# Altium PCB power1.PCBDOC
Units mil, origin at the board's own origin, x right, y up, seen from the top; angles counter-clockwise.
Board outline 6000 x 4000 mil, 2 copper layers (Top Layer, Bottom Layer); 46 components, 17 nets, 112 pads, 0 vias.
Unrouted connection lines stored in the file: 2.
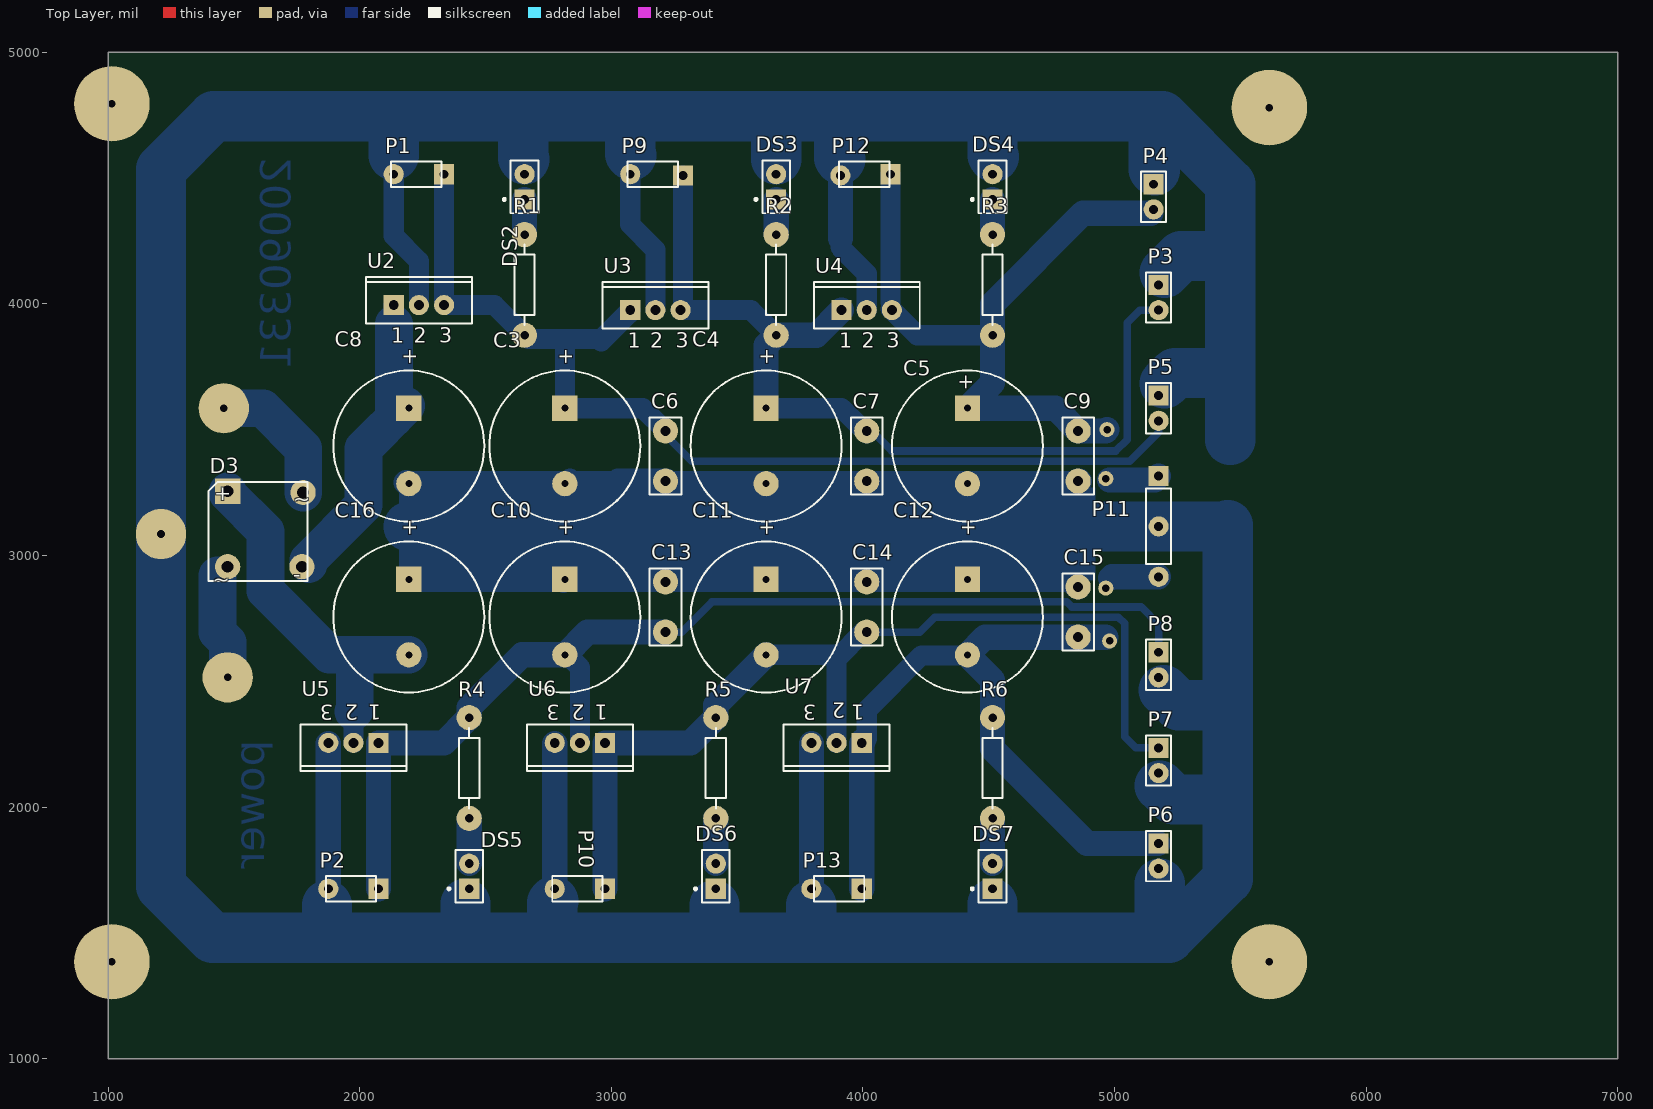
[diagram p0: Top Layer view]
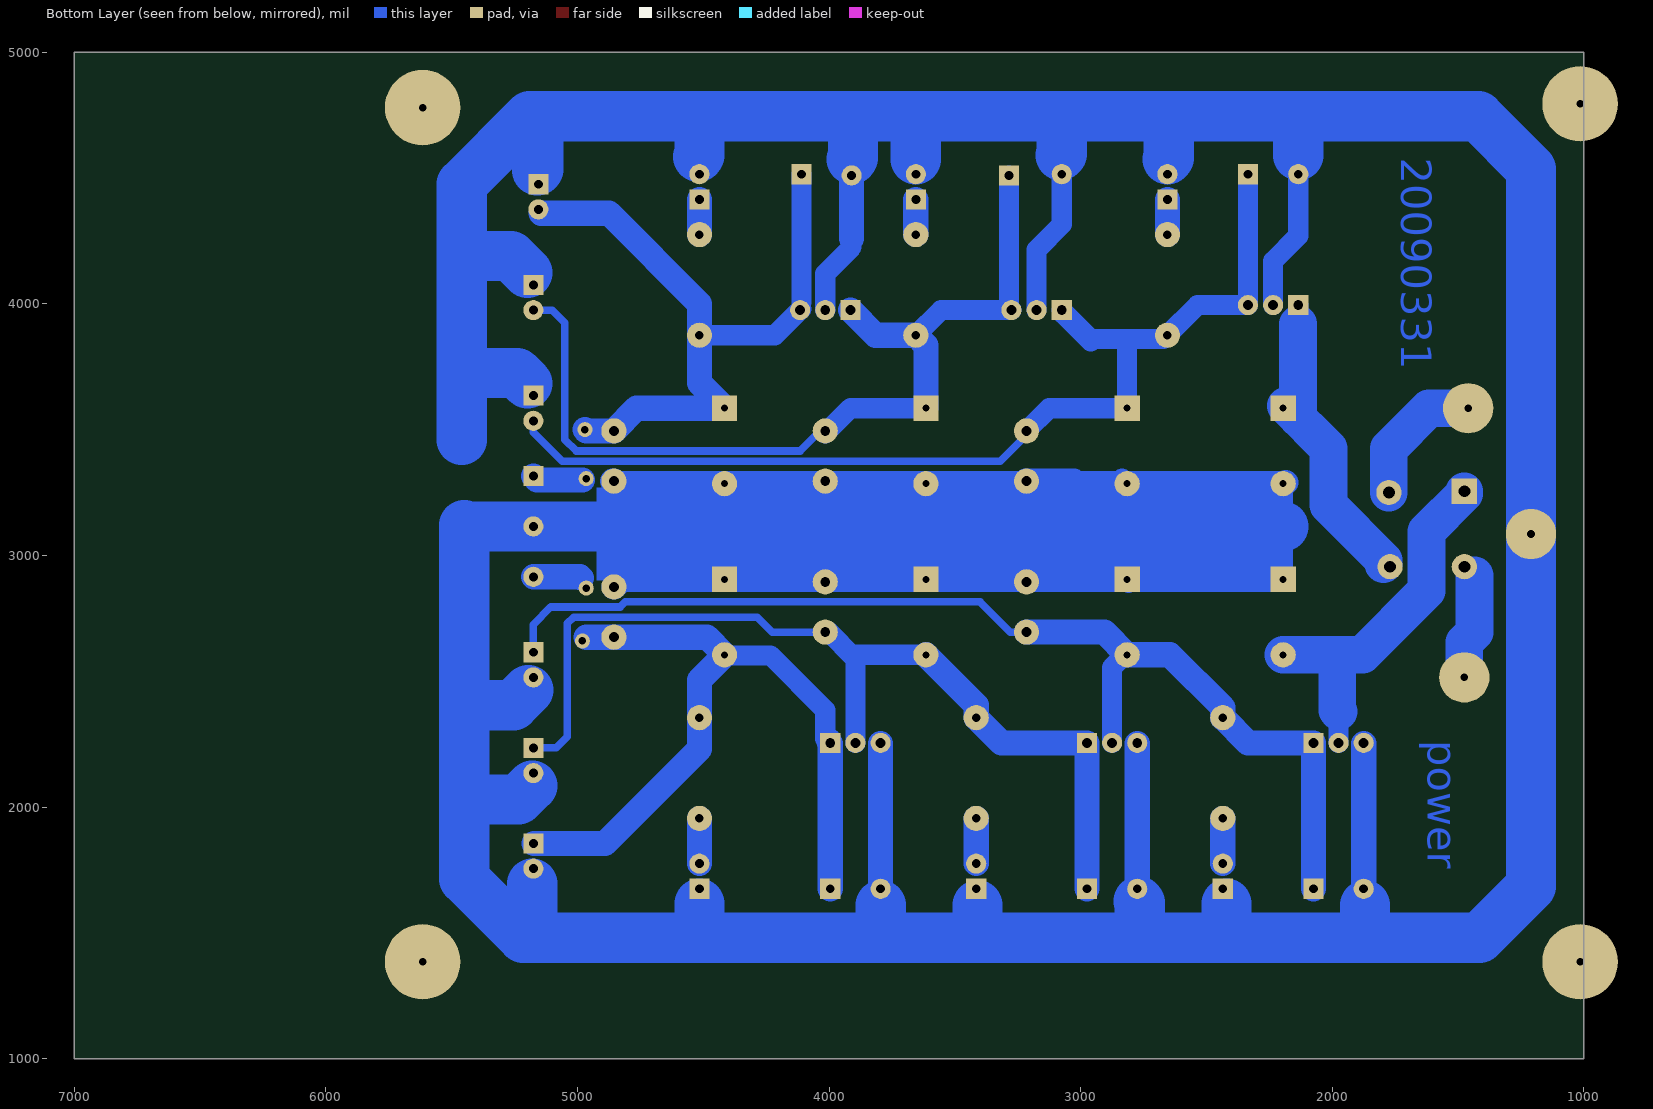
[diagram p1: Bottom Layer view, seen from below]

## Layer stack, top to bottom
Top Layer: signal copper 1.4
Dielectric: dielectric 12.6, FR-4, Dk 4.8
Bottom Layer: signal copper 1.4

## Board outline
1000,1000 7000,1000 7000,5000 1000,5000

## Design rules (kind name [scope] priority, off if disabled: settings)
Clearance [All] p1: gap=10
ComponentClearance [All] p1: gap=10 collisioncheckmode=3 verticalgap=10
PolygonConnect [All] p1: connectstyle=Relief reliefconductorwidth=10 reliefentries=4 polygonreliefangle="90 Angle"
RoutingVias [All] p1: holewidth=28 width=50 viastyle="Through Hole" minholewidth=28 minwidth=50 maxholewidth=28 maxwidth=50
SolderMaskExpansion [All] p1: expansion=4
TestPointUsage [All] p1: valid=0 allowmultiple=FALSE
Testpoint [All] p1: side=15 testpointundercomponent=TRUE minsize=40 maxsize=100 preferedsize=60 minholesize=0 maxholesize=40 preferedholesize=32 testpointgrid=1 style=1023 order=0-112345678
Width [All] p1: maxlimit=200 minlimit=10 preferedwidth=80 bottomlayer_prefwidth=200 minimp=50.000000 maximp=50.000000 favimp=50.000000
17 further rules are at their usual default settings.

## Components (designator, comment, footprint, x,y, rotation, side; value= is the part's Value field where it differs from the comment)
C3 "Cap Pol1" RB7.6-15 2815,3435 r90 top
C4 "Cap Pol1" RB7.6-15 3615,3435 r90 top
C5 "Cap Pol1" RB7.6-15 4415,3435 r90 top
C6 "Cap" CAPR5.08-7.8x3.2 3215,3395 r90 top
C7 "Cap" CAPR5.08-7.8x3.2 4015,3395 r90 top
C8 "Cap Pol1" RB7.6-15 2195,3435 r90 top
C9 "Cap" CAPR5.08-7.8x3.2 4855,3395 r90 top
C10 "Cap Pol1" RB7.6-15 2815,2755 r90 top
C11 "Cap Pol1" RB7.6-15 3615,2755 r90 top
C12 "Cap Pol1" RB7.6-15 4415,2755 r90 top
C13 "Cap" CAPR5.08-7.8x3.2 3215,2795 r270 top
C14 "Cap" CAPR5.08-7.8x3.2 4015,2795 r270 top
C15 "Cap" CAPR5.08-7.8x3.2 4855,2775 r270 top
C16 "Cap Pol1" RB7.6-15 2195,2755 r90 top
D3 "Bridge1" E-BIP-P4/D10 1595,3095 r0 top
DS2 "LED0" PIN2 2655,4415 r90 top
DS3 "LED0" PIN2 3655,4415 r90 top
DS4 "LED0" PIN2 4515,4415 r90 top
DS5 "LED0" PIN2 2435,1675 r90 top
DS6 "LED0" PIN2 3415,1675 r90 top
DS7 "LED0" PIN2 4515,1675 r90 top
P1 "Header 2" HDR1X2#1 2275,4515 r180 top
P2 "Header 2" HDR1X2#1 2015,1675 r180 top
P3 "Header 2" HDR1X2#2 5175,4075 r270 top
P4 "Header 2" HDR1X2#2 5155,4475 r270 top
P5 "Header 2" HDR1X2#2 5175,3635 r270 top
P6 "Header 2" HDR1X2#2 5175,1855 r270 top
P7 "Header 2" HDR1X2#2 5175,2235 r270 top
P8 "Header 2" HDR1X2#2 5175,2615 r270 top
P9 "Header 2" HDR1X2#3 3215,4515 r180 top
P10 "Header 2" HDR1X2#1 2915,1675 r180 top
P11 "Header 3" HDR1X3 5175,3215 r270 top
P12 "Header 2" HDR1X2#4 4055,4515 r180 top
P13 "Header 2" HDR1X2#5 3955,1675 r180 top
R1 "10K" AXIAL-0.4 2655,4075 r270 top
R2 "5K" AXIAL-0.4 3655,4075 r270 top
R3 "1K" AXIAL-0.4 4515,4075 r270 top
R4 "10K" AXIAL-0.4 2435,2155 r90 top
R5 "5K" AXIAL-0.4 3415,2155 r90 top
R6 "1K" AXIAL-0.4 4515,2155 r90 top
U2 "LM78L15ACZ" T03B 2235,3995 r0 top
U3 "LM78L12ACH" T03B 3175,3975 r0 top
U4 "LM78L05ACZ" T03B 4015,3975 r0 top
U5 "LM79L15ACZ" T03B 1975,2255 r180 top
U6 "LM79L12ACZ" T03B 2875,2255 r180 top
U7 "LM79L05ACZ" T03B 3895,2255 r180 top

## Footprints (in the part's own frame and the unit in brackets; to place one, negate y for a bottom-side part, rotate by r counter-clockwise, add the part's x,y. Pads: shape width x height; smd on the part's side, far side on the other; paste and mask are expansions set on the pad)
AXIAL-0.4 [mm] "Resistor; 2 Leads"
  round 2.541 hole 0.85: 1(-5.08,0) 2(5.08,0)
  silkscreen extent -4.06,-1.02 4.06,1.02
CAPR5.08-7.8x3.2 [mm] "Capacitor, Ceramic, Thru-Hole, Dipped Radial; Body 7.8 x 3.2 mm (WxT) Pin Spacing 5.08 mm (typ)"
  round 2.541 hole 1: 1(-2.54,0) 2(2.54,0)
  silkscreen extent -3.9,-1.6 3.9,1.6
E-BIP-P4/D10 [mil] "Bridge Rectifier; 4 Terminals; Body 9.4 x 9.4 mm (typ); Pitch 5.08 mm"
  rect 100.06x100.06 hole 47.24: 1(-120,160)
  round 100.06 hole 47.24: 2(-120,-140) 3(175,-140) 4(180,155)
  silkscreen extent -197,-197 197,197
HDR1X2#1 [mil] "Connector; Header; 2 Position"
  rect 80.06x80.06 hole 35.43: 1(-60,0)
  round 80.06 hole 35.43: 2(140,0)
  silkscreen extent -50,-50 150,50
HDR1X2#2 [mil] "Connector; Header; 2 Position"
  rect 80.06x80.06 hole 35.43: 1(0,0)
  round 80.06 hole 35.43: 2(100,0)
  silkscreen extent -50,-50 150,50
HDR1X2#3 [mil] "Connector; Header; 2 Position"
  rect 80.06x80.06 hole 35.43: 1(-70,5)
  round 80.06 hole 35.43: 2(140,0)
  silkscreen extent -50,-50 150,50
HDR1X2#4 [mil] "Connector; Header; 2 Position"
  rect 80.06x80.06 hole 35.43: 1(-55,0)
  round 80.06 hole 35.43: 2(145,5)
  silkscreen extent -50,-50 150,50
HDR1X2#5 [mil] "Connector; Header; 2 Position"
  rect 80.06x80.06 hole 35.43: 1(-40,0)
  round 80.06 hole 35.43: 2(160,0)
  silkscreen extent -50,-50 150,50
HDR1X3 [mm] "Connector; Header; 3 Position"
  rect 2.033x2.033 hole 0.9: 1(-2.54,0)
  round 2.033 hole 0.9: 2(2.54,0) 3(7.62,0)
  silkscreen extent -1.27,-1.27 6.35,1.27
PIN2 [mm] "Photosensitive Diode; 2 Leads"
  rect 2.033x2.033 hole 0.9: 1(0,0)
  round 2.033 hole 0.9: 2(2.54,0)
  silkscreen extent -1.4,-1.4 3.94,2.17
RB7.6-15 [mm] "Polarized Capacitor (Radial); 2 Leads"
  rect 2.541x2.541 hole 0.7: 1(3.81,0)
  round 2.541 hole 0.7: 2(-3.81,0)
  silkscreen extent -7.62,-7.62 7.62,7.62
T03B [mm] "TO, Thru-Hole, Vertical, Heatsink Mounted; 3 In-Line Leads; Pitch 2.54 mm"
  rect 2.033x2.033 hole 1: 1(-2.54,0)
  round 2.033 hole 1: 2(0,0) 3(2.54,0)
  silkscreen extent -5.35,-1.85 5.35,2.85

## Part data
C3 C4 C5 C8 C10 C11 C12 C16: "Polarized Capacitor (Radial)"
C6 C7 C9 C13 C14 C15: "Capacitor"
D3: "Full Wave Diode Bridge"
DS2 DS3 DS4 DS5 DS6 DS7: "Typical INFRARED GaAs LED"
P1 P2 P3 P4 P5 P6 P7 P8 P9 P10 P12 P13: "Header, 2-Pin"
P11: "Header, 3-Pin"
R1 R2 R3 R4 R5 R6: library part Res2, "Resistor"
U2 U3 U4: "3-Terminal Positive Regulator"
U5 U6 U7: "3-Terminal Negative Regulator"

## Free pads (board coordinates)
  round 60 hole 30: 0(4965,3305) 1(4965,2870) 2(4970,3500) 3(4980,2660)
  round 200 hole 30: 4(1460,3585) 5(1210,3085) 6(1475,2515)
  round 300 hole 30: 7(1015,1385) 7(1015,4795) 7(5615,1385) 7(5615,4780)

## Nets (pads, with @x,y where several pads share a name; then routed paths per layer and width w, separated by ;. In a path a pad name is that pad's centre, name@x,y a point inside that pad or via, vN(x,y) a via of type N, cw(c..) or ccw(c..) an arc to the next point about the centre after c; other vN are vias at no path point)
+5V: C5.1 C9.2 P4.2 P11.1 P12.1 pad.0 pad.2 R3.2 U4.3 | length 2988.3
  Bottom Layer w80: U4.3@4110,3980 4215,3875 R3.2 ; U4.3@4110,4006.31 P12.1
  Bottom Layer w100: pad.2 4965,3495 C9.2 4765,3585 C5.1 4515,3685 4515,4000 4875,4360 P4.2@5145,4360 ; pad.0@4980,3300 5160,3300 P11.1
+12V: C4.1 C7.2 P3.2 P9.1 R2.2 U3.3 U4.1 | length 3717.4
  Bottom Layer w30: C7.2 4035,3495 4115,3415 5005,3415 5050.51,3460.51 5050.51,3925.51 5100,3975 P3.2
  Bottom Layer w80: P9.1 3285,3985 U3.3 3555,3975 R2.2 ; C4.1 3915,3585 4015,3485 C7.2
  Bottom Layer w100: C4.1 3615,3835 R2.2 3815,3875 U4.1
+15V: C3.1 C6.2 P1.1 P5.2 R1.2 U2.3 U3.1 | length 4342.5
  Bottom Layer w30: C6.2 3215,3480 3320,3375 5060,3375 5175,3490 P5.2
  Bottom Layer w80: P1.1 U2.3 2535,3995 R1.2 2670,3860 2960,3860 U3.1 ; 2815,3860 C3.1 3125,3585 C6.2 ; 2960,3850 U3.1@3070,3960
-5V: C12.2 C15.2 P6.1 P11.3 P13.1 pad.1 pad.3 R6.2 U7.1 | length 3318.2
  Bottom Layer w80: U7.1@3995,2215 U7.1 ; U7.1@4000,2250 U7.1@4005,2250 ; U7.1@4015,2270 4015,2385 4232.7,2602.7 C12.2@4412.7,2602.7 ; C12.2 4470,2550
  Bottom Layer w100: P13.1 3995,2252.65 4000,2257.65 U7.1@4000,2265 ; pad.3@4965,2675 4485,2675 C12.2 4515,2505 4515,2230 4890,1855 P6.1@5172.65,1855 ; 4985,2910 4990,2915 P11.3
-12V: C11.2 C14.2 P7.1 P10.1 R5.2 U6.1 U7.2 | length 3917
  Bottom Layer w30: C14.2 4225,2695 4285,2755 5015,2755 5040,2730 5040,2280 5085,2235 P7.1
  Bottom Layer w80: 3575,2555 C11.2@3625,2605 ; C11.2 3910,2605 ; U7.2 3895,2590 4005,2700 C14.2@4010,2700
  Bottom Layer w100: P10.1 U6.1@2975,2252.65 ; U6.1 3315,2255 R5.2 3415,2405 C11.2
-15V: C10.2 C13.2 P2.1 P8.1 R4.2 U5.1 U6.2 | length 4458.1
  Bottom Layer w30: C13.2 3280,2695 3400,2815 4809.95,2815 4829.95,2795 5105,2795 5175,2725 P8.1
  Bottom Layer w80: C10.2@2820,2610 2875,2555 U6.2
  Bottom Layer w100: P2.1 U5.1@2075,2252.65 ; U5.1 2335,2255 R4.2 2435,2395 2645,2605 C10.2 2905,2695 C13.2
GND: C3.2 C4.2 C5.2 C6.1 C7.1 C8.2 C9.1 C10.1 C11.1 C12.1 C13.1 C14.1 C15.1 C16.1 DS2.2 DS3.2 DS4.2 DS5.1 DS6.1 DS7.1 P1.2 P2.2 P3.1 P4.1 P5.1 P6.2 P7.2 P8.2 P9.2 P10.2 P11.2 P12.2 P13.2 pad.5 U2.2 U3.2 U4.2 U5.3 U6.3 U7.3 | length 31922.6
  Bottom Layer w80: U5.3 U5.3@1875,2257.35 ; P1.2 2135,4270 2235,4170 U2.2 ; C3.2@2805,3295 C3.2 ; C10.1@2810,2890 C10.1@2815,2895 ; C10.1@2830,2895 C13.1 C13.1@3220,2890 ; C3.2@2835,3305 C3.2@2845,3295 ; 3025,3305 C6.1@3220,3305 ; P9.2 3075,4315 3175,4215 U3.2 ; C13.1@3225,2900 3610,2900 C11.1 C14.1@4010,2905 ; P12.2 3910,4225 4015,4120 U4.2 ; C14.1@4000,2900 4415,2900 4420,2895 4025,2895 C14.1@4025,2890
  Bottom Layer w100: P2.2 U5.3@1875,2252.65 ; C8.2@2185,3290 2190,3285 4850,3285 4860,3295 C9.1 C9.1@4845,3285 ; C16.1 C15.1@4825,2905 ; P10.2 U6.3@2775,2252.65 ; 3795,1480 3795,1515 ; 3795,1610 U7.3@3795,2252.65 ; 3910,4260 P12.2 ; C12.1 C15.1@4825,2905 ; C15.1 C15.1@4825,2905
  Bottom Layer w200: 1870,1490 1870,1610 ; 2135,4590 2135,4710 ; 2195,3115 5425,3115 5440,3100 ; 2420,1520 2420,1615.73 ; 2650,4710 2650,4580 2655,4575 ; 2765,1495 2765,1620 2770,1625 ; 3075,4720 3075,4595 3080,4590 ; 3410,1515 3410,1610 ; 3655,4575 3655,4720 ; 3795,1515 3795,1610 ; 3905,4720 3905,4580 3910,4575 ; 4515,1530 4515,1615.03 ; 4515,4725 4515,4590 4520,4585 ; 5155,4695 5155,4535 5160,4530 ; 5180,1525 5180,1695 ; 5180.03,2084.97 5235,2030 5415,2030 ; 5195.03,2464.97 5255,2405 5390,2405 ; 5198.22,3683.22 5240,3725 5415,3725 ; 5198.22,4123.22 5265,4190 5385,4190 ; 5450,3120 5450,1715 5215,1480 1415,1480 1210,1685 1210,4535 1420,4745 5190,4745 5460,4475 5460,3460
NetC8_1: C8.1 D3.3 U2.1 | length 1319.5
  Bottom Layer w80: D3.3 1785,2955 D3.3@1795.97,2965.97 ; 2135,3615 C8.1@2170,3580 ; 2135,3919.59 U2.1
  Bottom Layer w150: D3.3@1795.97,2965.97 1795.97,2980.97 2015,3200 2015,3425 C8.1@2185,3595 ; 2135,3919.59 2136.18,3918.41 2136.18,3546.18
NetC16_2: C16.2 D3.1 U5.2 | length 1583.8
  Bottom Layer w80: U5.2 1975,2380 ; 1975,2535 2045,2605
  Bottom Layer w150: D3.1 1475,3245 1625,3095 1625,2860 1880,2605 C16.2 ; 1975,2380 1980,2385 1980,2605
NetD3_2: D3.2 pad.6 | length 421.6
  Bottom Layer w150: 1435,2920 1435,2695 1475,2655 pad.6
NetD3_4: D3.4 pad.4 | length 556.3
  Bottom Layer w150: pad.4 1615,3585 1775,3425 D3.4
NetDS2_1: DS2.1 R1.1 | length 140
  Bottom Layer w100: R1.1 DS2.1
NetDS3_1: DS3.1 R2.1 | length 140
  Bottom Layer w100: R2.1 DS3.1
NetDS4_1: DS4.1 R3.1 | length 140
  Bottom Layer w100: R3.1 DS4.1
NetDS5_2: DS5.2 R4.1 | length 180
  Bottom Layer w100: DS5.2 R4.1
NetDS6_2: DS6.2 R5.1 | length 180
  Bottom Layer w100: DS6.2 R5.1
NetDS7_2: DS7.2 R6.1 | length 180
  Bottom Layer w100: DS7.2 R6.1

## Other copper
Bottom Layer:
  region net GND: 4925,2900 4925,3270 2155,3270 2155,2900
  text "20090331" at 1725,4580 h120 r90
  text "power" at 1620,2265 h120 r90

## Text inside footprints (layer, text, board x,y; h text height)
C3: Top Overlay "+" at 2844.01,3755.15 h59.06 r90
C4: Top Overlay "+" at 3644.01,3755.15 h59.06 r90
C5: Top Overlay "+" at 4435,3655 h59.06 r90
C8: Top Overlay "+" at 2224.01,3755.15 h59.06 r90
C10: Top Overlay "+" at 2844.01,3075.15 h59.06 r90
C11: Top Overlay "+" at 3644.01,3075.15 h59.06 r90
C12: Top Overlay "+" at 4444.01,3075.15 h59.06 r90
C16: Top Overlay "+" at 2224.01,3075.15 h59.06 r90
D3: Top Overlay "~" at 1735,3195 h59.05; Top Overlay "~" at 1415,2875 h59.05; Top Overlay "-" at 1735,2895 h59.05; Top Overlay "+" at 1421.38,3219.57 h59.06
U2: Top Overlay "3" at 2315.32,3844.41 h59.06; Top Overlay "1" at 2125.16,3844.41 h59.06; Top Overlay "2" at 2215.32,3844.41 h59.06
U3: Top Overlay "3" at 3255.32,3824.41 h59.06; Top Overlay "1" at 3065.16,3824.41 h59.06; Top Overlay "2" at 3155.32,3824.41 h59.06
U4: Top Overlay "3" at 4095.32,3824.41 h59.06; Top Overlay "1" at 3905.16,3824.41 h59.06; Top Overlay "2" at 3995.32,3824.41 h59.06
U5: Top Overlay "3" at 1894.68,2405.59 h59.06 r180; Top Overlay "1" at 2084.84,2405.59 h59.06 r180; Top Overlay "2" at 1994.68,2405.59 h59.06 r180
U6: Top Overlay "3" at 2794.68,2405.59 h59.06 r180; Top Overlay "1" at 2984.84,2405.59 h59.06 r180; Top Overlay "2" at 2894.68,2405.59 h59.06 r180
U7: Top Overlay "3" at 3814.68,2405.59 h59.06 r180; Top Overlay "1" at 4004.84,2405.59 h59.06 r180; Top Overlay "2" at 3930,2415 h59.06 r180